# Altium PCB PCB1.PcbDoc (part 2 of 2)
Units mil, origin at the board's own origin, x right, y up, seen from the top; angles counter-clockwise.
Board outline 2342.52 x 4192.91 mil, 4 copper layers (Top Layer, Ground Layer, Power Layer, Bottom Layer), stack 58.662 mil thick; 150 components, 92 nets, 452 pads, 265 vias.
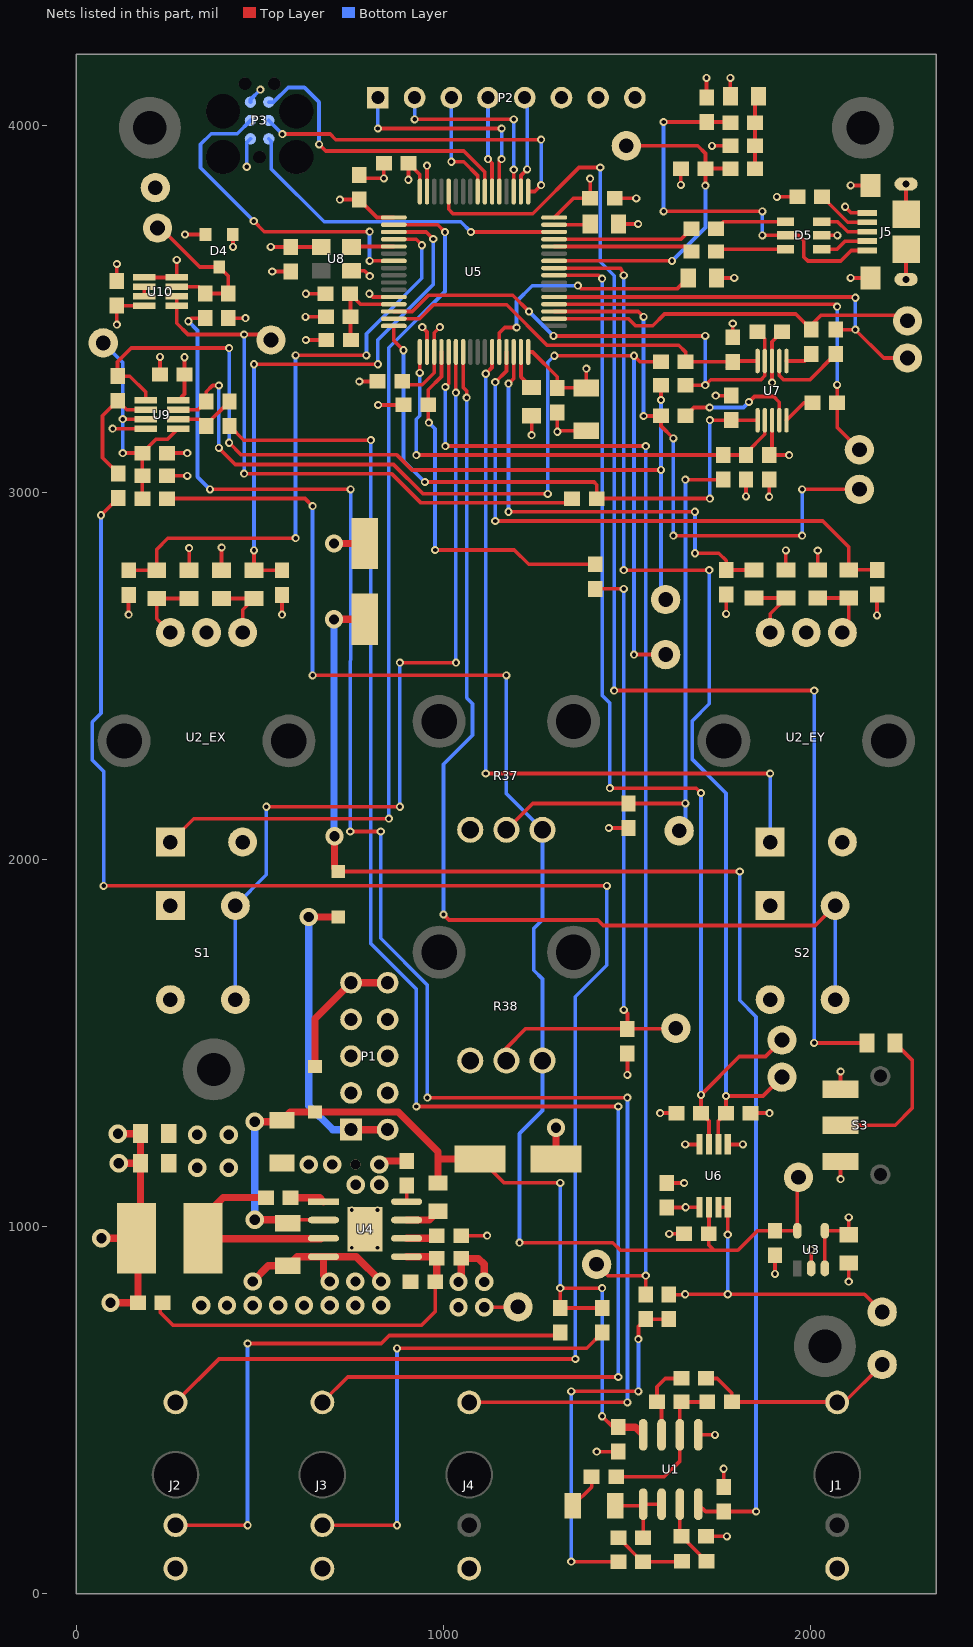
[diagram p4: the nets of this part, all layers, seen from the top]

## Via types
v1: diameter 22, hole 12, Top Layer to Bottom Layer, tented both sides, 224 vias
v2: diameter 50, hole 28, Top Layer to Bottom Layer, tented both sides, 34 vias
v3: diameter 20, hole 10, Top Layer to Bottom Layer, tented both sides, 4 vias
v4: diameter 50, hole 28, Top Layer to Bottom Layer, 2 vias
v5: diameter 0/0 (per signal layer), hole 28, Top Layer to Bottom Layer, tented both sides, 1 vias

## Nets (pads, with @x,y where several pads share a name; then routed paths per layer and width w, separated by ;. In a path a pad name is that pad's centre, name@x,y a point inside that pad or via, vN(x,y) a via of type N, cw(c..) or ccw(c..) an arc to the next point about the centre after c; other vN are vias at no path point)
+1.416V: C38.2 R29.2 R30.1 TP5.1 U9.3 U9.5 | length 687.2
  Top Layer w10: v1(126.2,3107) C38.2@179.54,3107 ; v1(126.2,3199.2) U9.3@188.71,3199.2 ; R29.2@179.54,2983 C38.2@179.54,3107 ; U9.5@277.29,3173.61 248.68,3145 217.54,3145 C38.2@179.54,3107
  Bottom Layer w10: TP5.1@73,3407 126.2,3353.8 v1(126.2,3199.2) v1(126.2,3107)
+2.5VREF: C7.2 C24.2 R29.1 R37.3 R38.3 TP2.1 U3.5 U6.2 | length 4079.2
  Top Layer w10: R29.1@246.46,2983 622.54,2983 v1(643.27,2962.27) ; v1(643.27,2501.27) v1(1171.27,2501.27) ; v1(1207,956) 1461,956 1482,935 1737,935 ; C24.2@1722.46,980 1722.46,949.54 1737,935 ; C24.2@1723.2,980.74 U6.2@1723.2,1052.5 ; U3.5@1963.9,988.46 C7.2@1903,988.46 1855.46,988.46 1802,935 1737,935 ; U3.5@1964,988.36 TP2.1@1964,1131
  Bottom Layer w10: v1(643.27,2501.27) v1(643.27,2962.27) ; v1(1171.27,2501.27) 1171.27,2179.06 R37.3@1269.69,2080.64 1269.69,1835.69 1246,1812 1246,1698 1269.69,1674.31 R38.3@1269.69,1451.97 1269.69,1315.69 1207,1253 v1(1207,956)
+3.3V: C10.2 C14.1 C15.1 C16.1 C25.2 C26.2 C27.2 C30.1 C31.2 C32.2 C33.2 C34.2 C35.2 C39.2 C41.2 D4.2 L1.1 L2.1 P2.7 P3.1 R6X.2 R6Y.2 R7X.1 R7Y.1 R11.1 R16.1 R17.1 S3.3 TP3.1 U3.3 U3.4 U5.1 U5.19 U5.32 U5.48 U5.64 U6.1 U7.8 U8.4 U9.8 U10.8 | length 3402.5
  Top Layer w10: v1(110,3457) C41.2@110,3508.54 ; C41.2@110.08,3508.61 U10.8@184.71,3508.61 ; U9.8@277.29,3250.39 294.46,3267.56 C39.2@294.46,3321 v1(294.46,3368) ; v1(295.71,3702.29) D4.2@351.6,3702.29 ; R6X.2@306.94,2787.73 v1(306.94,2847.94) ; R7X.1@395.34,2787.73 v1(395.34,2849.66) ; v1(529.46,3668.46) C27.2@584,3668.46 U8.4@666.69,3668.48 ; v1(625,3415) L2.1@680.54,3415 ; v1(717.54,3797.54) C35.2@770,3797.54 818.9,3748.64 U5.1@864.5,3748.64 ; C31.2@887.46,3302 896.46,3293 942,3293 974.73,3325.73 U5.19@974.73,3382.5 974.73,3434.73 v1(990,3450) ; v1(904.46,3851.46) C34.2@904.46,3897 935.36,3866.1 U5.64@935.36,3819.5 ; v2@1104,780 TP3.1@1202,780 ; U5.32@1230.64,3382.5 1242.5,3382.5 1310,3315 C32.2@1310,3284.46 C30.1@1388.61,3284.46 ; U5.48@1301.5,3748.64 1353.87,3801 C33.2@1399.54,3801 v1(1399.54,3854.54) ; C30.1@1389,3284.07 v1(1389,3337) ; v1(1590,1309) R17.1@1634.54,1309 ; C25.2@1608,1051.54 v1@1658.54,1051.54 ; v1(1659.5,1052.5) U6.1@1697.61,1052.5 ; R16.1@1836.46,1309 v1(1888,1309) ; U7.8@1895,3196.29 1895,3109.46 C26.2@1887,3101.46 v1(1941.54,3101.46) ; R6Y.2@1932.74,2788.73 v1(1932.74,2841.74) ; R7Y.1@2019.54,2788.73 v1(2019.54,2841.54) ; U3.3@2038.8,886 U3.4@2038.8,988.36 2093.02,988.36 C10.2@2104,977.39 v1(2104,1025) ; S3.3@2081.69,1374.02 v1(2081.69,1422.24)
  Top Layer w20: v2(68,968) L1.1@163.45,968 ; v2(93,792) C14.1@167.54,792 L1.1@167.54,963.91 ; v2(113,1253) C16.1@174.61,1253 C15.1@174.61,1172 ; v2(115,1172) C15.1@174.61,1172 ; L1.1@174.61,979.16 C15.1@174.61,1172 ; v2@1048.46,856.46 R11.1@1048.46,913 1095,913 1111,897 v2(1111,849)
  Bottom Layer w10: v1(464,3887) 464,3953 P3.1@474,3963
  other v2: 1041,780 1111,780 1041,849
ADC_SPI_CLK: R22.2 TP12.1 U5.34 | length 1030.8
  Top Layer w10: U5.34@1301.5,3473.05 1503.95,3473.05 1523,3454 1570,3454 1602,3486 1959.46,3486 R22.2@2002,3443.46 2002,3456 2028,3482 2249,3482 TP12.1@2264,3467
ADC_SPI_CS: R25.2 TP15.1 U5.37 | length 1132.8
  Top Layer w10: U5.37@1301.5,3532.1 v1@2119.9,3532.1 ; R25.2@2068.46,3443 v1(2122,3443) 2199,3366 TP15.1@2264,3366
  Bottom Layer w10: v1(2122,3443) v1(2122,3530)
ADC_SPI_MISO: R24.2 TP14.1 U5.35 | length 1540
  Top Layer w10: U5.35@1301.5,3492.73 1530.27,3492.73 v1(1545,3478) ; v1(1545,3208) R24.2@1592.54,3208 1592.54,3180.46 v1(1626,3147) ; v1(1626,2882) v1(1977,2882) ; v1(1977,3008) TP14.1@2133,3008
  Bottom Layer w10: v1(1545,3208) v1(1545,3478) ; v1(1626,2882) v1(1626,3147) ; v1(1977,2882) v1(1977,3008)
ADC_SPI_MOSI: R23.2 TP13.1 U5.36 | length 1188.7
  Top Layer w10: U5.36@1301.5,3512.42 2066.05,3512.42 v1(2072.46,3506) ; v1(2072.46,3292.54) R23.2@2072.46,3244 2072.46,3176.54 TP13.1@2133,3116
  Bottom Layer w10: v1(2072.46,3292.54) v1(2072.46,3506)
BOOT1: R27.2 U5.28 | length 676.5
  Top Layer w10: U5.28@1151.9,3382.5 1151.9,3433.9 1167,3449 v1(1199,3449) ; v1(1366,3563) 1374,3555 1637.61,3555 R27.2@1666.61,3584
  Bottom Layer w10: v1(1199,3449) 1199,3520 1242,3563 v1(1366,3563)
"BUTTON 1": S1.3 S1.4 U5.22 | length 2315.9
  Top Layer w10: v1(517.4,2143.4) v1(881,2143.4) ; v1(881,2536) v1(1034,2536) ; v1(1033.79,3271.79) U5.22@1033.79,3382.5
  Bottom Layer w10: S1.4@433.07,1618.09 S1.3@433.07,1874 517.4,1958.33 v1(517.4,2143.4) ; v1(881,2143.4) v1(881,2536) ; v1@1033.79,2536 v1(1033.79,3271.79)
"BUTTON 2": S2.3 S2.4 U5.23 | length 2933.4
  Top Layer w10: v1(1000,1850) 1015,1835 1420,1835 1435,1820 2012.93,1820 S2.3@2066.93,1874 ; U5.23@1053.47,3382.5 1053.47,3285.53 1063,3276 v1(1063,3258)
  Bottom Layer w10: v1(1000,1850) 1000,2259 1079,2338 1079,2424 1063,2440 v1(1063,3258) ; S2.4@2066.93,1618.09 S2.3@2066.93,1874
DAC_SCL: R16.2 TP16.1 U5.41 U6.6 | length 3042.8
  Top Layer w10: U5.41@1301.5,3610.84 1483.16,3610.84 v1(1491,3591) ; v1(1491,2788) v1(1724,2788) ; U6.6@1748.8,1223.5 1748.8,1288.26 R16.2@1769.54,1309 v1(1769.54,1355.54) 1870.54,1355.54 TP16.1@1922,1407
  Bottom Layer w10: v1(1491,2788) v1(1491,3591) ; v1(1724,2788) 1724,2424 1678,2378 1678,2272 1769.54,2180.46 v1(1769.54,1355.54)
DAC_SDA: R17.2 TP17.1 U5.40 U6.7 | length 3033.8
  Top Layer w10: U5.40@1301.5,3591.16 1422.84,3591.16 v1(1432,3582) ; v1(1453,2194) 1688.46,2194 v1(1701.46,2181) ; U6.7@1723.2,1223.5 1723.2,1287.26 R17.2@1701.46,1309 v1(1701.46,1358.46) 1806,1463 1877,1463 TP17.1@1922,1508
  Bottom Layer w10: v1(1432,3582) 1432,2447 1453,2426 v1(1453,2194) ; v1(1701.46,1358.46) v1(1701.46,2181)
GND: C4.1 C5X.1 C5Y.1 C6X.1 C6Y.1 C7.1 C8.2 C9.1 C10.1 C12.2 C13.2 C15.2 C16.2 C17.1 C18.1 C19.2 C20.2 C21.2 C22.2 C23.2 C24.1 C25.1 C26.1 C27.1 C28.1 C29.1 C30.2 C31.1 C32.1 C33.1 C34.1 C35.1 C36.1 C37.1 C38.1 C39.1 C40.1 C41.1 C42.1 C43.1 C44.1 C45.1 C54.1 C55.1 D4.1 D5.2 J1.1 J2.1 J3.1 J4.1 J5.5 J5.S1 J5.S2 J5.S3 J5.S4 J5.S5 J5.S6 P1.3 P1.4 P1.5 P1.6 P1.7 P1.8 P2.8 P3.5 R12.2 R27.1 R30.2 R37.1 R38.1 R40.2 R43.1 R45.2 S1.1 S1.2 S2.1 S2.2 S3.1 TP1.1 U1.5 U2_EX.2 U2_EX.4 U2_EY.2 U2_EY.4 U3.2 U4.4 U4.9 U5.12 U5.18 U5.63 U6.5 U6.8 U7.3 U8.2 U9.4 U10.4 U10.5 | length 4215.7
  Top Layer w10: v1(98.61,3173.61) U9.4@188.71,3173.61 ; C41.1@110,3575.46 v1(110,3622) ; v1(142,2667) C5X.1@142,2720.76 ; U10.5@184.71,3585.39 U10.4@273.29,3585.39 v1(273.29,3633.29) ; C39.1@227.54,3321 v1(227.54,3369) v1@227.54,3371.54 ; R30.2@246.46,3045 v1(302,3045) ; C38.1@246.46,3107 v1(302,3107) ; R40.2@414,3474.54 v1(460.46,3474.54) ; v1(426.4,3668.6) D4.1@426.4,3702.29 ; v1(533.54,3601.54) C27.1@584,3601.54 ; v1(560,2667) C6X.1@560,2720.76 ; v1(624,3478) C37.1@679.54,3478 ; v1(625,3541) C36.1@678.54,3541 ; U8.2@749.37,3603.52 784.48,3603.52 v1(799,3589) ; C35.1@770,3864.46 779,3855.46 v1(837.54,3855.46) C34.1@837.54,3897 ; v1(771,3302) C31.1@820.54,3302 ; C9.1@782.58,2863.09 C9.1@785.14,2860.53 ; v1(798,3541) 806.9,3532.1 U5.12@864.5,3532.1 ; v1(822,3238) C23.2@891.54,3238 ; v1(942,3450) 955.05,3436.95 U5.18@955.05,3382.5 ; U5.63@955.05,3819.5 v1(955.05,3890.05) ; C17.1@1035.28,969.25 C17.1@1035.53,969 ; C17.1@1048.46,975 v1(1119,975) ; v1(1240,3156) C29.1@1240,3208.61 ; v1(1310,3165) C32.1@1310,3217.54 ; v1@1312.93,3167.93 C30.2@1389,3167.93 ; v1(1417.54,386.54) C54.1@1476,386.54 ; v1(1450.54,2085.54) C40.1@1504,2085.54 ; C33.1@1466.46,3801 v1(1525,3801) ; C28.1@1476.39,3731 v1(1530,3731) ; v1(1501,1413) C42.1@1501,1471.54 ; C25.1@1608,1118.46 v1(1655.54,1118.46) ; v1(1615,980) C24.1@1655.54,980 ; v1(1646.61,3837.65) R45.2@1646.61,3881.94 ; v1(1658.5,1223.5) U6.8@1697.61,1223.5 ; U1.5@1694,432.49 v1(1739.51,432.49) ; C4.1@1715.46,156 v1(1772,156) ; C43.1@1716.54,4075.79 v1(1716.54,4128.94) ; v1(1731.34,3943.94) C44.1@1781.61,3943.94 ; v1(1741.54,3263.46) C21.2@1784,3263.46 ; R27.1@1743.39,3584 v1(1792,3584) ; C55.1@1763,290.46 v1(1763,340) ; v1(1770,2669) C5Y.1@1770,2721.54 ; U6.5@1774.39,1223.5 v1(1815.5,1223.5) ; C45.1@1781.5,4078.74 v1(1781.5,4128.94) ; C20.2@1788,3422.46 v1(1788,3460) ; v1(1824,2989) C22.2@1824,3034.54 ; v1(1887,2988) C26.1@1887,3034.54 ; v1(1895,3299) U7.3@1895,3357.71 1895,3410.54 C19.2@1922.46,3438 ; v1(1903,871) C7.1@1903,921.54 ; v1(1908,3805) R43.1@1964.54,3805 ; U3.2@2001.4,886 v1(2001.4,936.4) ; D5.2@2030.21,3700 v1(2073,3700) ; v1(2081.69,1128.94) S3.1@2081.69,1177.16 ; v1(2094,3778) 2110.82,3761.18 J5.5@2154.68,3761.18 ; v1(2104,850) C10.1@2104,900.61 ; v1(2109.02,3584.02) J5.S1@2163.54,3584.02 ; v1(2109.02,3835.98) J5.S2@2163.54,3835.98 ; v1(2181,2665) C6Y.1@2181,2721.54 ; J5.S5@2260,3580.08 J5.S4@2260,3662.76 ; J5.S3@2260,3757.24 J5.S6@2260,3839.92
  Top Layer w20: v2(480,850) 522.93,892.93 C13.2@576,892.93 600.75,917.68 U4.4@673.07,917.68 ; v2@629.07,1172.93 v2(633,1169) ; v2@673.07,866.93 U4.4@673.07,917.68 ; v4(701.77,2860.53) C9.1@785.14,2860.53 ; v2(825,1169) 834.46,1178.46 C18.1@900,1178.46 ; v2(830,850) 762.32,917.68 U4.4@673.07,917.68 ; C8.2@1306.35,1184 v2(1306.35,1269.35)
  Bottom Layer w10: P3.5@474,4063 474,4070 v1(501,4097)
  other v2: 340,785 410,785 480,785 550,785 620,785 690,785 760,785 830,785 690,850 760,850 761,1114 825,1114 329,1160 415,1160 697,1169 329,1250 415,1250
  other v3: 750,942 820,942 750,1045 820,1045
  other v5: 760,1169
NetC1_1: C1.1 R3.1 R4.2 | length 198.9
  Top Layer w10: C1.1@1476.54,152 1541.54,87 R3.1@1543.46,87 R4.2@1648.54,87
NetC1_2: C1.2 C3.1 U1.1 U1.2 | length 247.3
  Top Layer w10: C3.1@1468.07,239 1539.49,239 U1.1@1544,243.51 ; C1.2@1544,152.54 U1.1@1544,243.51 ; U1.2@1594,272 U1.2@1594,243.51 U1.1@1544,243.51
NetC2_1: C2.1 R5.2 U1.7 | length 212.5
  Top Layer w10: U1.7@1594,432.49 1594,509.54 C2.1@1581.54,522 1581.54,563.54 1604,586 R5.2@1648.54,586
NetC2_2: C2.2 R1.2 R2.1 U1.6 | length 418
  Top Layer w10: R2.1@1470.46,318 1601,318 1644,361 U1.6@1644,432.49 C2.2@1644,517.54 ; C2.2@1648.46,522 R1.2@1718.54,522
NetC3_2: C3.2 R2.2 | length 127.8
  Top Layer w10: C3.2@1351.93,266.39 C3.2@1351.93,239 1403.54,290.61 R2.2@1403.54,318
NetC4_2: C4.2 R4.1 U1.3 | length 179
  Top Layer w10: C4.2@1644,160.54 U1.3@1644,243.51 ; C4.2@1648.54,156 R4.1@1716.46,88.07
NetC5_U_Encoders_X_2: C5X.2 R8X.2 U5.4 | length 1661.6
  Top Layer w10: C5X.2@142,2787.69 R8X.2@218.54,2787.73 ; R8X.2@218.54,2787.73 218.54,2844.54 249,2875 v1(597,2875) ; v1(597,3373) v1(790,3373) ; U5.4@864.5,3689.58 925.42,3689.58 v1@941.5,3673.5
  Bottom Layer w10: v1(597,2875) v1(597,3373) ; v1(790,3373) 790,3432 941,3583 v1(941,3673)
NetC5_U_Encoders_Y_2: C5Y.2 R8Y.2 U5.30 | length 1256.8
  Top Layer w10: v1(1177,2947) v1(1684.93,2947) ; v1(1177,3296) 1191.27,3310.27 U5.30@1191.27,3382.5 ; v1(1685,2834) 1750,2834 1770,2814 C5Y.2@1770,2788.46 R8Y.2@1845.67,2788.46
  Bottom Layer w10: v1(1177,2947) v1(1177,3296) ; v1@1684.93,2834 v1(1684.93,2947)
NetC6_U_Encoders_X_2: C6X.2 R9X.2 U5.3 | length 1493.8
  Top Layer w10: v1(483.74,2841.74) R9X.2@483.74,2787.73 C6X.2@560,2787.69 ; v1(483.74,3349) v1(821,3349) ; U5.3@864.5,3709.27 952.73,3709.27 v1(972,3690)
  Bottom Layer w10: v1(483.74,2841.74) v1(483.74,3349) ; v1(821,3349) 821,3415 972,3566 v1(972,3690)
NetC6_U_Encoders_Y_2: C6Y.2 R9Y.2 U5.29 | length 1604.6
  Top Layer w10: v1(1141,2922) 2033,2922 2104,2851 R9Y.2@2104,2788.73 C6Y.2@2180.73,2788.73 ; v1(1141,3300) 1171.58,3330.58 U5.29@1171.58,3382.5
  Bottom Layer w10: v1(1141,2922) v1(1141,3300)
NetC11_1: C11.1 L1.2 U4.3 | length 574.2
  Top Layer w20: L1.2@344.55,967 U4.3@665.75,967 ; L1.2@344.55,968 344.55,1023.55 400,1079 C11.1@519,1079
NetC11_2: C11.2 U4.1 | length 93.9
  Top Layer w20: C11.2@583.46,1078 662.75,1078 U4.1@673.07,1067.68
NetC14_2: C14.2 R11.2 R12.1 U4.5 | length 1018.8
  Top Layer w10: C14.2@228.56,792 228.56,765.44 263,731 940,731 977.46,768.46 R12.1@977.46,850 ; R11.2@980,910.04 R11.2@980.16,910.2
  Top Layer w20: U4.5@899.45,917.68 R11.2@972.36,917.68 ; R12.1@981.54,854.07 R11.2@981.54,913
NetC17_2: C17.2 U4.6 | length 74.8
  Top Layer w20: U4.6@899.45,967.68 C17.2@974.21,967.68
NetC18_2: C18.2 U4.8 | length 49.2
  Top Layer w10: U4.8@900,1068.23 C18.2@900,1117.44
NetC19_1: C19.1 R13.1 U5.14 U7.4 | length 1402
  Top Layer w10: U5.14@864.5,3492.73 914.73,3492.73 959,3537 1188.73,3537 v1(1233,3492.73) ; v1(1299.73,3426) v1(1713,3426) ; R13.1@1659.46,3292 v1(1713,3292) 1728,3307 1865,3307 1875.32,3317.32 U7.4@1875.32,3357.71 1875.32,3418.22 C19.1@1855.54,3438
  Bottom Layer w10: v1(1233,3492.73) v1(1299.73,3426) ; v1(1713,3292) v1(1713,3426)
NetC20_1: C20.1 R14.1 U5.15 U7.5 | length 1104.5
  Top Layer w10: U5.15@864.5,3473.05 935.05,3473.05 973,3511 1172,3511 1282,3401 1641,3401 1659.46,3382.54 R14.1@1659.46,3356 ; R14.1@1659.93,3355.54 C20.1@1788,3355.54 C20.1@1773.46,3341 ; C20.1@1790.17,3357.71 U7.5@1855.63,3357.71
NetC21_1: C21.1 R15.1 U5.16 U7.6 | length 1620.9
  Top Layer w10: U5.16@864.5,3453.36 864.5,3413.5 v1(891,3387) ; v1(949,3028) 1410,3028 1417.46,3020.54 R15.1@1417.46,2983 v1(1725.46,2983) ; v1(1725.46,3196.54) C21.1@1784,3196.54 ; C21.1@1784.24,3196.29 U7.6@1855.63,3196.29
  Bottom Layer w10: v1(891,3387) 891,3086 v1(949,3028) ; v1(1725.46,2983) v1(1725.46,3196.54)
NetC22_1: C22.1 R18.1 U5.17 U7.7 | length 1298
  Top Layer w10: v1(926,3101.46) R18.1@1762,3101.46 C22.1@1824,3101.46 ; v1(935.36,3325.36) U5.17@935.36,3382.5 ; C22.1@1826.46,3101.46 1826.46,3109.46 1875.32,3158.32 U7.7@1875.32,3196.29
  Bottom Layer w10: v1(926,3101.46) 926,3199 935.36,3208.36 v1(935.36,3325.36)
NetC23_1: C23.1 R19.1 U5.20 | length 1012.1
  Top Layer w10: v1@958.46,3191.54 C23.1@958.46,3238 958.46,3279.46 994.42,3315.42 U5.20@994.42,3382.5 ; v1(977,2843) 1193,2843 1232.07,2803.93 R19.1@1413,2803.93
  Bottom Layer w10: v1(960,3190) 977,3173 v1(977,2843)
NetC28_2: C28.2 U5.47 | length 96.1
  Top Layer w10: U5.47@1301.5,3728.95 C28.2@1397.57,3728.95
NetC29_2: C29.2 U5.31 | length 109.1
  Top Layer w10: U5.31@1210.95,3382.5 1210.95,3314.43 C29.2@1240,3285.39
NetC36_2: C36.2 C37.2 L2.2 U5.13 | length 253.5
  Top Layer w10: L2.2@746.46,3416 C37.2@746.46,3478 746.46,3540 774.05,3512.42 U5.13@864.5,3512.42
NetC40_2: C40.2 R18.2 R37.2 TP8.1 | length 1584.1
  Top Layer w10: R37.2@1171.27,2080.64 1243.09,2152.46 C40.2@1504,2152.46 v1(1659,2152.46) ; v1(1659,3034.54) R18.2@1762,3034.54
  Bottom Layer w10: TP8.1@1642,2078 1659,2095 v1(1659,2152.46) v1(1659,3034.54)
NetC42_2: C42.2 R19.2 R38.2 TP11.1 | length 1796.8
  Top Layer w10: R38.2@1171.27,1451.97 1171.27,1486.27 1223.46,1538.46 C42.2@1501,1538.46 ; R19.2@1413,2737 v1(1491,2737) ; v1(1491,1590) 1501,1580 C42.2@1501,1538.46 ; TP11.1@1631.46,1538.46 C42.2@1501,1538.46
  Bottom Layer w10: v1(1491,1590) v1(1491,2737)
NetC43_2: C43.2 D5.5 J5.1 L3.1 | length 1111.6
  Top Layer w10: v1(1599.46,3765.54) v1(1868.46,3765.54) ; v1(1599.46,4008.91) C43.2@1716.54,4008.86 L3.1@1779.68,4008.86 ; v1(1868.46,3700) D5.5@1931.79,3700 1968,3700 1981,3687 1981,3642 1993,3630 2082,3630 2110.82,3658.82 J5.1@2154.68,3658.82
  Bottom Layer w10: v1(1599.46,3765.54) v1(1599.46,4008.91) ; v1(1868.46,3700) v1(1868.46,3765.54)
NetC44_2: C44.2 C45.2 L3.2 R44.1 | length 200.8
  Top Layer w10: R44.1@1848.54,3881.94 C44.2@1848.54,3943.94 L3.2@1848.54,4006.94 1848.54,4069.01 C45.2@1858.27,4078.74
NetD1_1: D1.1 P1.9 P1.10 | length 368.6
  Top Layer w20: D1.1@650,1436 650,1566 P1.9@748,1664 P1.10@848,1664
NetD2_2: D2.2 P1.1 P1.2 | length 835.9
  Top Layer w20: v2(633,1842.98) D2.2@713,1842.98 ; P1.1@748,1264 P1.2@848,1264
  Bottom Layer w20: v2(633,1842.98) 633.01,1328.99 698,1264 P1.1@748,1264
NetD4_3: D4.3 R39.1 R40.1 TP9.1 U10.3 | length 442.9
  Top Layer w10: TP9.1@221,3720 230,3720 336.29,3613.71 D4.3@389,3613.71 414,3588.71 R40.1@414,3541.46 R39.1@351,3541.46 332.67,3559.8 U10.3@273.29,3559.8
NetD5_1: D5.1 J5.2 | length 133.5
  Top Layer w10: D5.1@2030.21,3662.6 2072.6,3662.6 2094.41,3684.41 J5.2@2154.68,3684.41
NetD5_3: D5.3 J5.3 | length 135.8
  Top Layer w10: D5.3@2030.21,3737.4 2073.6,3737.4 2101,3710 J5.3@2154.68,3710
NetD5_4: D5.4 R42.1 | length 197.4
  Top Layer w10: R42.1@1742.46,3718 1761.86,3737.4 D5.4@1931.79,3737.4
NetD5_6: D5.6 R41.1 | length 197.4
  Top Layer w10: R41.1@1742.46,3656 R41.1@1752.86,3645.6 ; R41.1@1749.06,3662.6 D5.6@1931.79,3662.6
NetJ1_3: J1.3 R1.1 R5.1 TP4.1 | length 562
  Top Layer w10: R5.1@1715.46,586 1746,586 1785.46,546.54 R1.1@1785.46,522 J1.3@2071.37,522 ; J1.3@2072.52,520.85 2091.85,520.85 TP4.1@2195,624
NetJ2_2: J2.2 R33.1 | length 1555.3
  Top Layer w10: J2.2@270,186.2 v1(466.2,186.2) ; v1(466.2,681.2) 830.2,681.2 852,703 1310,703 R33.1@1318,711
  Bottom Layer w10: v1(466.2,186.2) v1(466.2,681.2)
NetJ2_3: J2.3 R32.2 | length 4932.3
  Top Layer w10: v1(67,2937.54) R32.2@114,2984.54 ; v1(74,1928) v1(1445,1928) ; J2.3@270,520.85 388.15,639 v1(1359,639)
  Bottom Layer w10: v1(67,2937.54) 67,2398 43,2374 43,2271 74,2240 v1(74,1928) ; v1(1359,639) 1359,1626 1445,1712 v1(1445,1928)
NetJ3_2: J3.2 R36.1 | length 1262.6
  Top Layer w10: J3.2@670,186.2 v1(873.2,186.2) ; v1(873.2,668) 1390,668 R36.1@1433,711
  Bottom Layer w10: v1(873.2,186.2) v1(873.2,668)
NetJ3_3: J3.3 R35.2 | length 4389
  Top Layer w10: R35.2@417,3180.54 455.54,3142 v1(802,3142) ; J3.3@670,520.85 739.15,590 v1(1476,590) ; v1(926,1327) v1(1476,1327)
  Bottom Layer w10: v1(802,3142) 802,1771 926,1647 v1(926,1327) ; v1(1476,590) v1(1476,1327)
NetJ4_3: J4.3 R39.2 | length 4513.7
  Top Layer w10: v1(305,3466) 313.54,3474.54 R39.2@351,3474.54 ; v1(364,3008) v1(747,3008) ; v1(746,2076) v1(829,2076) ; v1(956,1351) v1(1501,1351) ; J4.3@1070,520.85 v1(1501,520.85)
  Bottom Layer w10: v1(305,3466) 330,3441 330,3042 v1(364,3008) ; v1(746,2076) v1(747,3008) ; v1(829,2076) 829,1785 956,1658 v1(956,1351) ; v1(1501,520.85) v1(1501,1351)
NetJ5_4: J5.4 R43.2 | length 152
  Top Layer w10: R43.2@2031.46,3805 2100.87,3735.59 J5.4@2154.68,3735.59
NetR3_2: R3.2 R20.1 R21.1 | length 1043.4
  Top Layer w10: v1(1348,87) R3.2@1476.54,87 ; v1(1348,551) v1(1531,551) ; v1(1531,693) 1531,727.54 R21.1@1551,747.54 R20.1@1614,747.54
  Bottom Layer w10: v1(1348,87) v1(1348,551) ; v1(1531,551) v1(1531,693)
NetR6_U_Encoders_X_1: R6X.1 R8X.1 U2_EX.5 | length 196.7
  Top Layer w10: U2_EX.5@255.91,2618.11 218.54,2655.47 R8X.1@218.54,2710.96 R6X.1@306.94,2710.96
NetR6_U_Encoders_Y_1: R6Y.1 R8Y.1 U2_EY.5 | length 198.5
  Top Layer w10: R8Y.1@1845.94,2711.96 R6Y.1@1932.74,2711.96 1889.76,2668.98 U2_EY.5@1889.76,2618.11
NetR7_U_Encoders_X_2: R7X.2 R9X.1 U2_EX.3 | length 194.1
  Top Layer w10: R7X.2@395.34,2710.96 R9X.1@483.74,2710.96 452.76,2679.98 U2_EX.3@452.76,2618.11
NetR7_U_Encoders_Y_2: R7Y.2 R9Y.1 U2_EY.3 | length 160.9
  Top Layer w10: R7Y.2@2019.54,2711.96 R9Y.1@2104,2711.96 U2_EY.3@2104,2635.5
NetR10_2: R10.2 U4.7 | length 95.5
  Top Layer w20: U4.7@899.45,1017.68 961.06,1017.68 R10.2@985,1041.61
NetR13_2: R13.2 R31.1 TP6.1 U9.1 | length 2530.7
  Top Layer w10: U9.1@188.71,3250.39 188.71,3273.29 145.54,3316.46 R31.1@112,3316.46 112,3356 149,3393 v1(416,3393) ; v1(416,3135) 449,3102 873,3102 914,3061 v1(1592.54,3061) ; v1(1592.54,3251.46) R13.2@1592.54,3292
  Bottom Layer w10: v1(416,3135) v1(416,3393) ; v1(1592.54,3251.46) v1(1592.54,3061) 1592.54,2720.46 TP6.1@1605,2708
NetR14_2: R14.2 R34.1 TP7.1 U9.7 | length 2852.1
  Top Layer w10: U9.7@277.29,3224.8 331.33,3224.8 R34.1@354,3247.46 354,3274 371,3291 v1(388,3291) ; v1(388,3121) 433,3076 864,3076 944,2996 v1(1284,2996) ; v1(1302,3372) v1(1519,3372) 1535,3356 R14.2@1592.54,3356 ; v1(1519,2558) TP7.1@1605,2558
  Bottom Layer w10: v1(388,3121) v1(388,3291) ; v1(1284,2996) 1284,3354 v1(1302,3372) ; v1(1519,2558) v1(1519,3372)
NetR15_2: R15.2 TP10.1 U10.1 U10.2 | length 1659
  Top Layer w10: U10.2@273.29,3534.2 U10.1@273.29,3508.61 273.29,3460.71 304,3430 v1(457,3430) 515,3430 TP10.1@530,3415 ; v1(457,3051) 858,3051 937,2972 1339.54,2972 R15.2@1350.54,2983
  Bottom Layer w10: v1(457,3051) v1(457,3430)
NetR22_1: R22.1 U7.1 | length 75.4
  Top Layer w10: U7.1@1934.37,3357.71 1983.17,3357.71 R22.1@2002,3376.54
NetR23_1: R23.1 U7.10 | length 90.9
  Top Layer w10: U7.10@1934.37,3196.29 1982.08,3244 R23.1@2005.54,3244
NetR24_1: R24.1 U7.9 | length 332.9
  Top Layer w10: R24.1@1659.46,3208 1682.46,3231 v1(1725,3231) ; v1(1832,3246) 1847,3261 1899.37,3261 1914.69,3245.69 U7.9@1914.69,3196.29
  Bottom Layer w10: v1(1725,3231) 1817,3231 v1(1832,3246)
NetR25_1: R25.1 U7.2 | length 226.2
  Top Layer w10: U7.2@1914.69,3357.71 1914.69,3318.31 1926,3307 1998.46,3307 R25.1@2068,3376.54
NetR31_2: R31.2 R32.1 U9.2 | length 319.8
  Top Layer w10: R32.1@114,3051.46 71,3094.46 71,3208.54 R31.2@112,3249.54 136.74,3224.8 U9.2@188.71,3224.8
NetR34_2: R34.2 R35.1 U9.6 | length 177.5
  Top Layer w10: U9.6@277.29,3199.2 335.33,3199.2 R34.2@354,3180.54 354,3184.46 R35.1@417,3247.46
NetR41_2: R41.2 U5.44 | length 379.8
  Top Layer w10: U5.44@1301.5,3669.9 1661.64,3669.9 R41.2@1675.54,3656
NetR42_2: R42.2 U5.45 | length 385.8
  Top Layer w10: U5.45@1301.5,3689.58 1647.12,3689.58 R42.2@1675.54,3718
NetR44_2: R44.2 R45.1 TP20.1 U5.42 | length 943.6
  Top Layer w10: U5.42@1301.5,3630.53 v1(1622.47,3630.53) ; TP20.1@1498,3944 1692.81,3944 1713.54,3923.28 R45.1@1713.54,3881.94 ; v1(1713.54,3835.68) R45.1@1713.54,3881.94 ; R44.2@1781.61,3881.94 R45.1@1713.54,3881.94
  Bottom Layer w10: v1(1622.47,3630.53) 1713.54,3721.54 v1(1713.54,3835.68)
NetR46_1: R46.1 U5.60 | length 3608.1
  Top Layer w10: U5.60@1014.1,3819.5 1014.1,3770.9 1026,3759 1243,3759 1369,3885 v1(1427,3885) ; v1(1465,2460) v1(2010,2460) ; v1(2009.84,1500) R46.1@2153.54,1500
  Bottom Layer w10: v1(1427,3885) 1427,3628 1465,3590 v1(1465,2460) ; v1@2010,1500 v1(2010,2460)
NetR46_2: R46.2 S3.2 | length 411.4
  Top Layer w10: S3.2@2081.69,1275.59 2230.32,1275.59 2276.57,1321.85 2276.57,1453.74 R46.2@2230.32,1500
NetU2_U_Encoders_X_1: U2_EX.1 U5.2 | length 2430.6
  Top Layer w10: U2_EX.1@255.91,2047.24 319.66,2111 v1(851,2111) ; U5.2@864.5,3728.95 984.05,3728.95 v1(1004,3709)
  Bottom Layer w10: v1(851,2111) 851,3394 1004,3547 v1(1004,3709)
NetU2_U_Encoders_Y_1: U2_EY.1 U5.27 | length 2117.1
  Top Layer w10: v1(1115,2234) v1(1889.76,2234) ; v1(1115,3323) 1132.21,3340.21 U5.27@1132.21,3382.5
  Bottom Layer w10: v1(1115,2234) v1(1115,3323) ; U2_EY.1@1889.76,2047.24 v1(1889.76,2234)
NetU5_5: U5.5 U8.3 | length 113.7
  Top Layer w10: U8.3@750.79,3669.9 U5.5@864.5,3669.9
NetU10_6: U10.6 U10.7 | length 25.6
  Top Layer w10: U10.7@184.71,3534.2 U10.6@184.71,3559.8
NRST: P3.3 U5.7 | length 905
  Top Layer w10: v1(483,3739) 512,3710 v1(798.53,3710) ; v1(798.53,3630.53) U5.7@864.5,3630.53
  Bottom Layer w10: P3.3@474,4013 438,3977 367,3977 338,3948 338,3884 v1(483,3739) ; v1(798.53,3630.53) v1(798.53,3710)
OLED_3_3V: P2.6
OLED_CS: P2.5 U5.50 | length 265.3
  Top Layer w10: U5.50@1210.95,3819.5 1210.95,3862.95 v1(1228,3880)
  Bottom Layer w10: P2.5@1221.26,4075 1228,4068.26 v1(1228,3880)
OLED_DC: P2.3 U5.56 | length 305.2
  Top Layer w10: v1(1021.26,3900.59) 1055.41,3900.59 1092.84,3863.16 U5.56@1092.84,3819.5
  Bottom Layer w10: v1(1021.26,3900.59) P2.3@1021.26,4075
OLED_RESET: P2.4 U5.54 | length 260.2
  Top Layer w10: v1(1121.29,3907.71) 1132.21,3896.79 U5.54@1132.21,3819.5
  Bottom Layer w10: v1@1121.26,3907.48 P2.4@1121.26,4075
OLED_SPI_CLK: P2.2 U5.51 | length 525.5
  Top Layer w10: v1(921.26,4016.03) v1(1191.27,4016.03) ; U5.51@1191.27,3819.5 v1(1191.27,3879.27)
  Bottom Layer w10: v1(921.26,4016.03) P2.2@921.26,4075 ; v1(1191.27,3879.27) v1(1191.27,4016.03)
OLED_SPI_MOSI: P2.1 U5.53 | length 595.4
  Top Layer w10: v1(821.26,3991.14) v1(1158.46,3991.14) ; U5.53@1151.9,3819.5 1151.9,3901.14 v1(1158.46,3907.71)
  Bottom Layer w10: v1(821.26,3991.14) P2.1@821.26,4075 ; v1(1158.46,3907.71) v1(1158.46,3991.14)
SWCLK: P3.4 U5.49 | length 929.9
  Top Layer w10: v1(561,3976) 691.32,3976 706.69,3960.63 v1(1266,3960.63) ; U5.49@1230.64,3819.5 1248.5,3819.5 v1(1266,3837)
  Bottom Layer w10: P3.4@524,4013 v1(561,3976) ; v1(1266,3837) v1(1266,3960.63)
SWDIO: P3.2 U5.46 | length 926.5
  Top Layer w10: v1(1074.73,3709.27) U5.46@1301.5,3709.27
  Bottom Layer w10: P3.2@524,3963 531,3956 531,3881 675,3737 1047,3737 v1(1074.73,3709.27)
SWO: P3.6 U5.55 | length 820.9
  Top Layer w10: v1(661,3948) 679,3930 1055,3930 1112.53,3872.47 U5.55@1112.53,3819.5
  Bottom Layer w10: P3.6@524,4063 537,4063 577,4103 621,4103 661,4063 v1(661,3948)
V_DAC_I2C: R20.2 TP18.1 U6.3 U6.4 | length 862.8
  Top Layer w10: R20.2@1614,814.46 v1@1657.46,814.46 ; v1(1658.39,815.39) v1(1774.39,815.39) 2146.61,815.39 TP18.1@2195,767 ; U6.3@1748.8,1052.5 U6.4@1774.39,1052.5 v1(1774.39,977.61)
  Bottom Layer w10: v1(1774.39,815.39) v1(1774.39,977.61)
V_DAC_INT: R21.2 TP19.1 U5.21 | length 3264.6
  Top Layer w10: v1(1005,3126) v1(1551,3126) ; v1(1005,3287) 1014.1,3296.1 U5.21@1014.1,3382.5 ; TP19.1@1417,897 1448,866 v1(1551,866) R21.2@1551,814.46
  Bottom Layer w10: v1(1005,3126) v1(1005,3287) ; v1(1551,866) v1(1551,3126)
VCC: C8.1 C12.1 C13.1 C54.2 D1.2 R10.1 R33.2 R36.2 U1.8 U4.2 | length 2502.8
  Top Layer w10: C13.1@576.14,1018.15 U4.2@672.6,1018.15 ; C8.1@1099.65,1184 1164.65,1119 v1(1318,1119) ; v1(1432,483) 1461.54,453.46 C54.2@1476,453.46 ; v1(1432,832) v1(1318,832) R33.2@1318,777.93 R36.2@1433,777.93
  Top Layer w20: v2(486,1018) 567.07,1018 C13.1@576,1009.07 ; v2(486,1285) C12.1@555.93,1285 ; C12.1@560,1289.07 582.91,1311.98 D1.2@650,1311.98 877,1312 985,1204 R10.1@985,1118.39 ; 986,1184 C8.1@1099.65,1184 ; C54.2@1476,453.46 1523.02,453.46 U1.8@1544,432.49
  Bottom Layer w10: v1(1318,832) v1(1318,1119) ; v1(1432,483) v1(1432,832)
  Bottom Layer w20: v2(486,1018) v2(486,1285)
VEE: C9.2 C55.2 D2.1 U1.4 | length 3796.5
  Top Layer w10: D2.1@713,1967 v1(1807,1967) ; U1.4@1694,243.51 1713.98,223.54 C55.2@1763,223.54 v1(1851.46,223.54)
  Top Layer w20: v4(701.77,2653.84) C9.2@785.14,2653.84 ; v2(703,2063) 703,1977 D2.1@713,1967
  Bottom Layer w10: v1(1807,1967) 1807,1616 1851.46,1571.54 v1(1851.46,223.54)
  Bottom Layer w20: v4(701.77,2653.84) 701.77,2064.23 v2(703,2063)
pads on no net: J1. J1.2 J2. J3. J4. J4.2 MH1.1 MH2.1 MH3.1 MH4.1 P3.A P3.B P3.C P3.D P3.E P3.F P3.G R37. R38. S3. U2_EX. U2_EY. U3.1 U5.6 U5.8 U5.9 U5.10 U5.11 U5.24 U5.25 U5.26 U5.33 U5.38 U5.39 U5.43 U5.52 U5.57 U5.58 U5.59 U5.61 U5.62 U8.1

## Polygon pours and split planes (outlines as drawn)
GND on Top Layer "Bottom Plane-No Net" (solid, pour order 8): 388,1123 720,1123 730,1123 730,1089 855,1089 855,1218 388,1218
GND on Top Layer "Bottom Plane-No Net" (solid, pour order 6): 229,1287 445,1287 446,1286 446,1123 229,1123
GND on Top Layer "Bottom Plane-No Net" (solid, pour order 4): 436,894 892,894 892,751 287,751 287,821 434,821 436,823 436,894
GND on Ground Layer (split plane): 2322.42,20.1 20.1,20.1 20.1,4172.82 2322.42,4172.82
no net on Power Layer (split plane): 630.91,3923.09 368.09,3923.09 368.09,4063.91 630.91,4063.91
GND on Power Layer (split plane): 854.91,1086.09 608.09,1086.09 608.09,1200.91 854.91,1200.91
GND on Power Layer (split plane): 879.91,759.09 294.09,759.09 294.09,811.91 436,811.91 438.61,812.26 441.04,813.26 443.13,814.87 444.74,816.96 445.74,819.39 446.09,822 446.09,883.91 879.91,883.91
+3.3V on Power Layer (split plane): 2322.42,20.1 20.1,20.1 20.1,4172.82 2322.42,4172.82

## Keep-outs
Keep-Out Layer:
  the board outline again, w10

## Other copper
Top Layer:
  rectangle net +3.3V: 1012,748 1138,883
  rectangle net GND: 739,883 835,1093
Power Layer (plane layer: these items are gaps in the copper):
  lines w20: 358,3913 640,3913 ; 358,3914 358,4074 640,4074 ; 641,3910 641,4070 ; 890,749 284,749 284,822 436,822 436,894 890,894 890,750 ; 598,1076 865,1076 865,1211 598,1211 598,1076

## Silkscreen, mask and mechanical layers (free items; w line width, h text height)
Bottom Overlay:
  text "Designer: Ben Paik" at 2023.83,3619.47 h39.37
  text "001-001-V3.1" at 2023.83,3545.47 h39.37
  text "Serial#:" at 2025.83,3474.47 h39.37
Drill Drawing:
  the board outline again, w10

## Text inside footprints (layer, text, board x,y; h text height)
J5: 3D Top "PCB END" at 2321.02,3897.01 h73.82 r90; 3D Top "PCB END" at 2321.02,3897.01 h73.82 r90
P1: Bottom Overlay "10" at 828,1724 h50 r270; Bottom Overlay "9" at 728,1724 h50 r270; Bottom Overlay "1" at 728,1184 h50 r270; Bottom Overlay "2" at 828,1164 h50 r270
U6: Top Overlay "*" at 1685.61,1030 h50 r90; 3D Top "*" at 1728,1079.5 h50 r90